# Altium PCB Inclinometer.PcbDoc
Units mm, origin at the board's own origin, x right, y up, seen from the top; angles counter-clockwise.
Board outline 73.8 x 82.4 mm, 2 copper layers (Top Layer, Bottom Layer), stack 0.98 mm thick; 52 components, 41 nets, 407 pads, 70 vias.
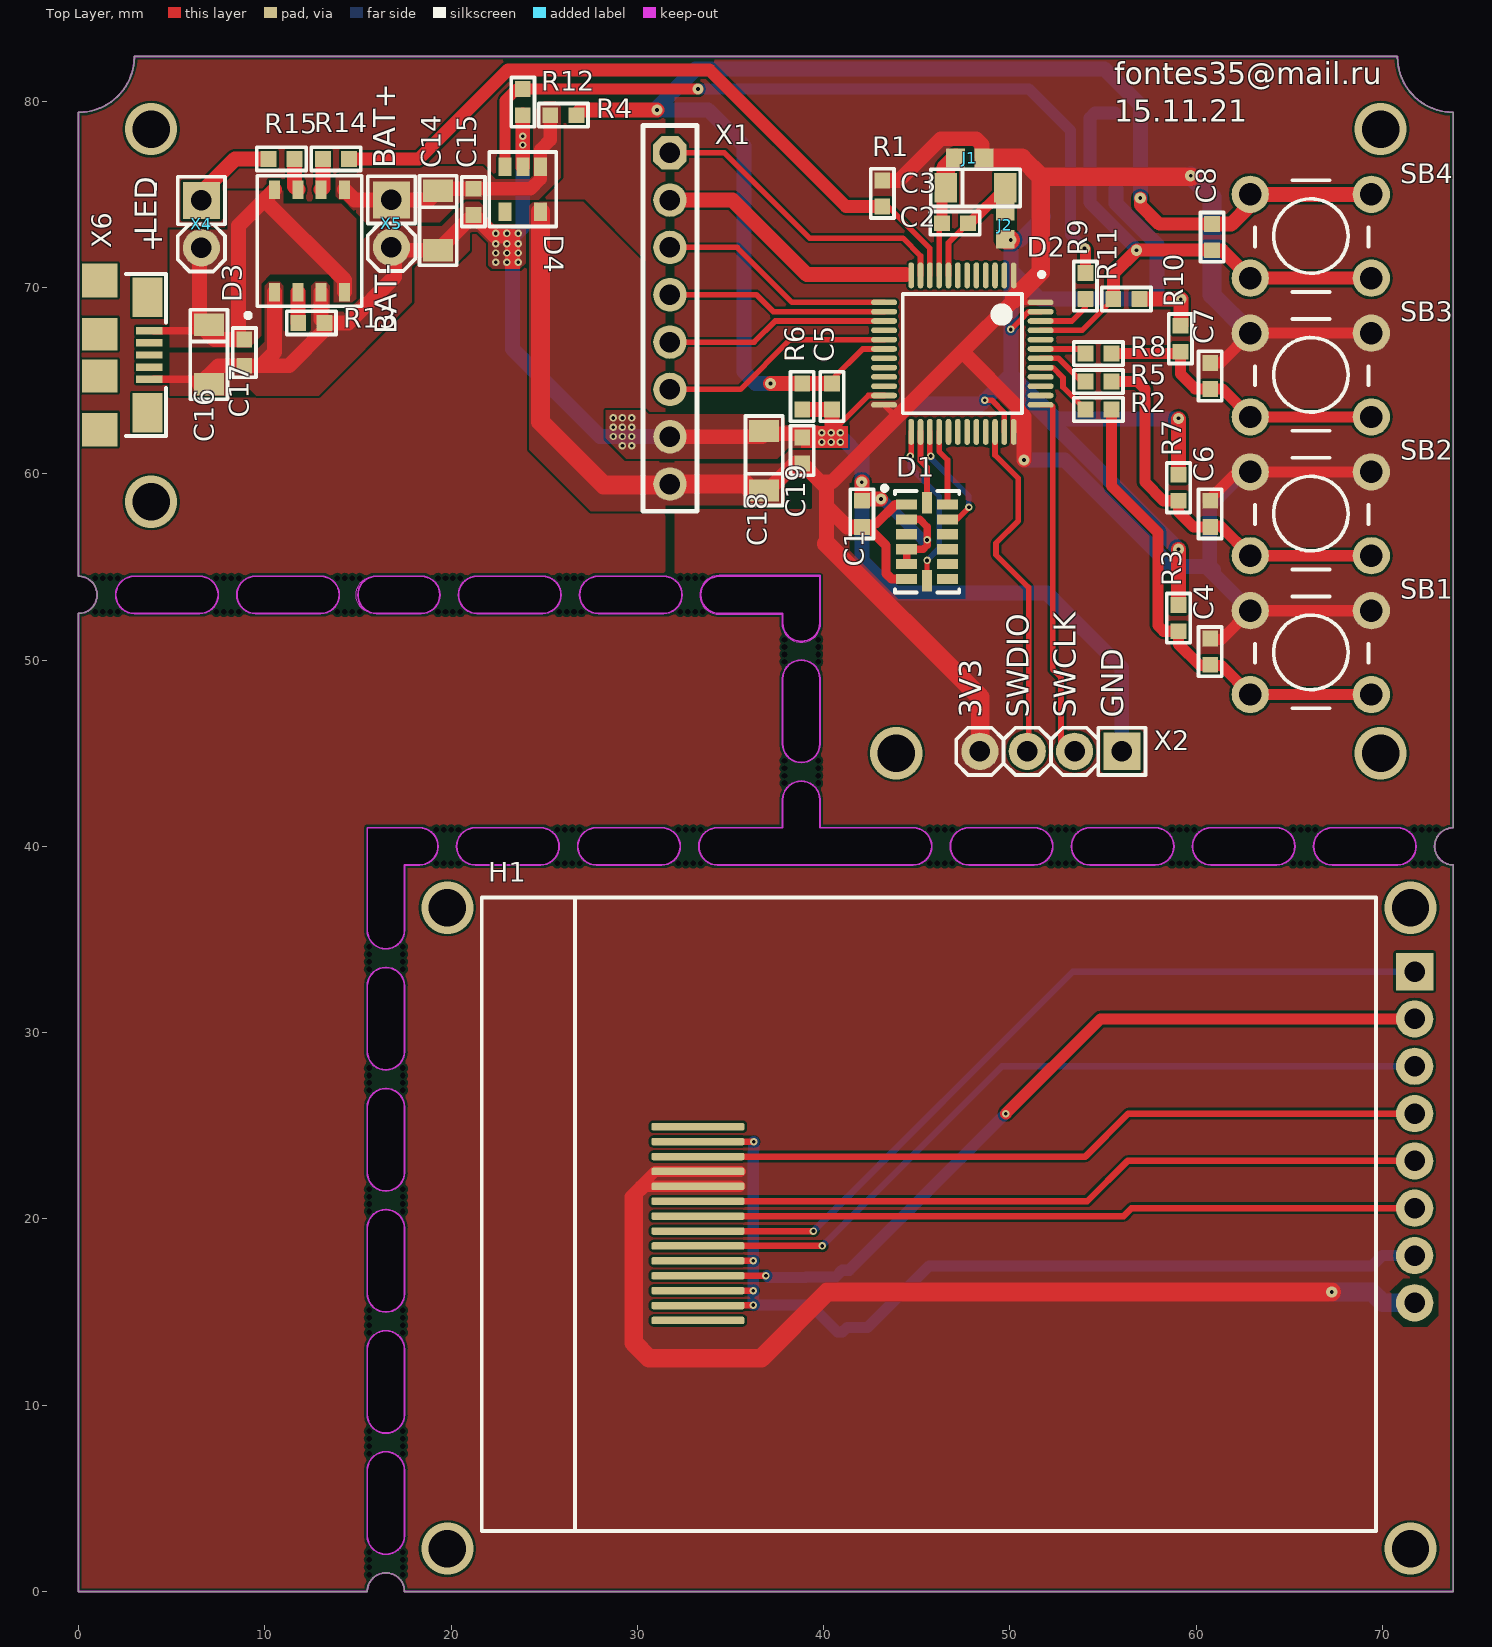
[diagram p0: Top Layer view]
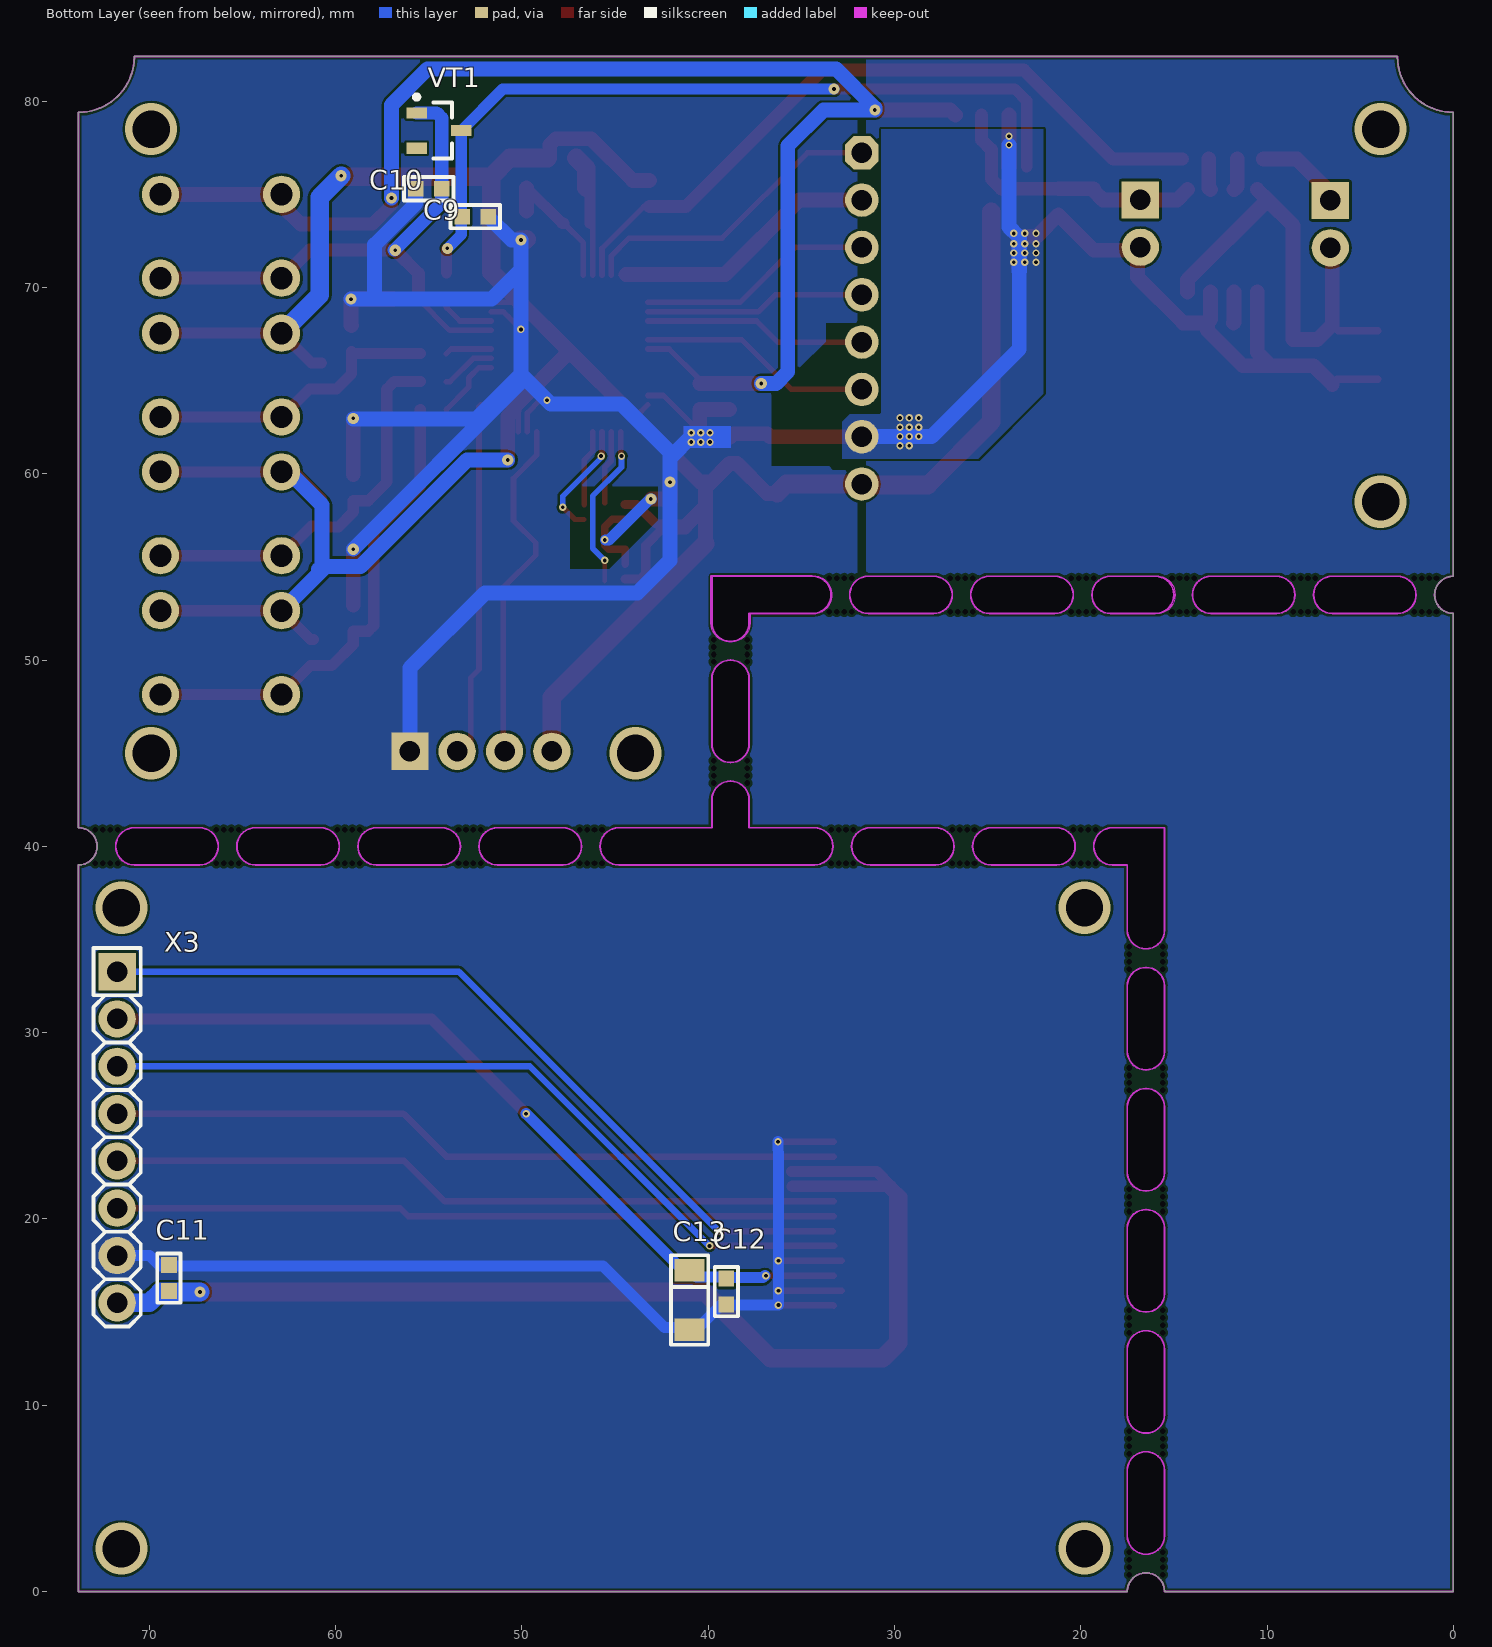
[diagram p1: Bottom Layer view, seen from below]
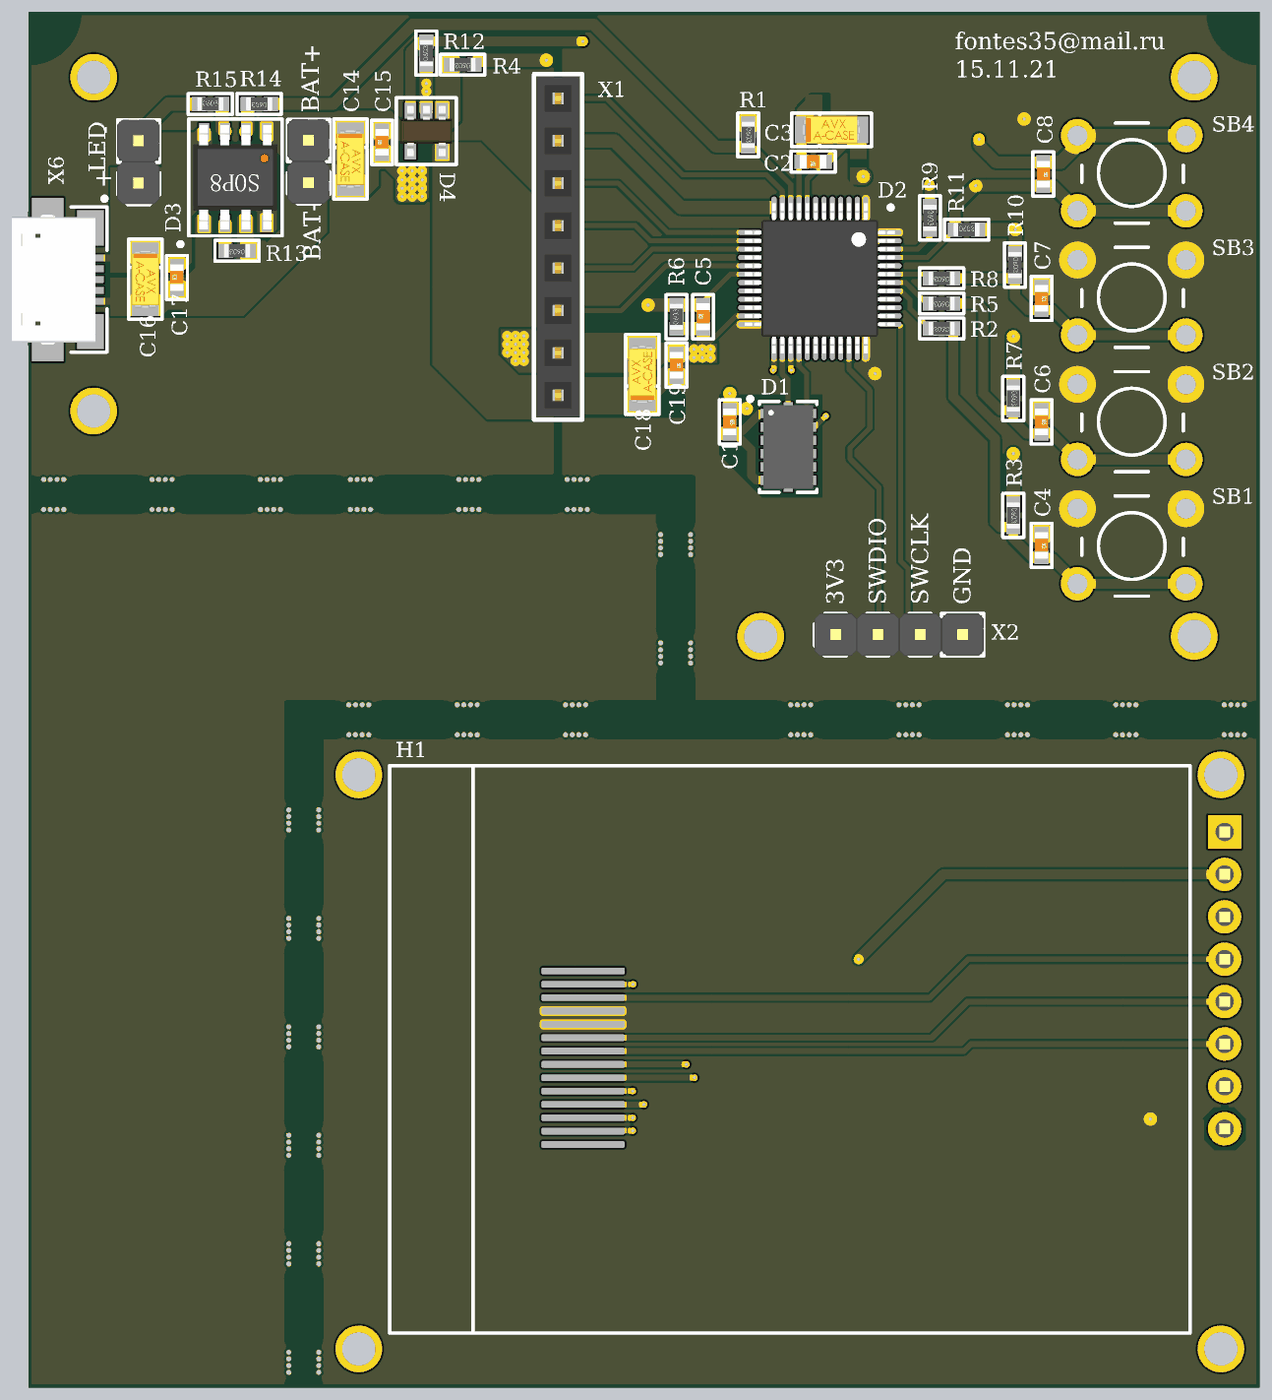
[diagram p2: 3D render of the assembled board from above, using the file's embedded part models]
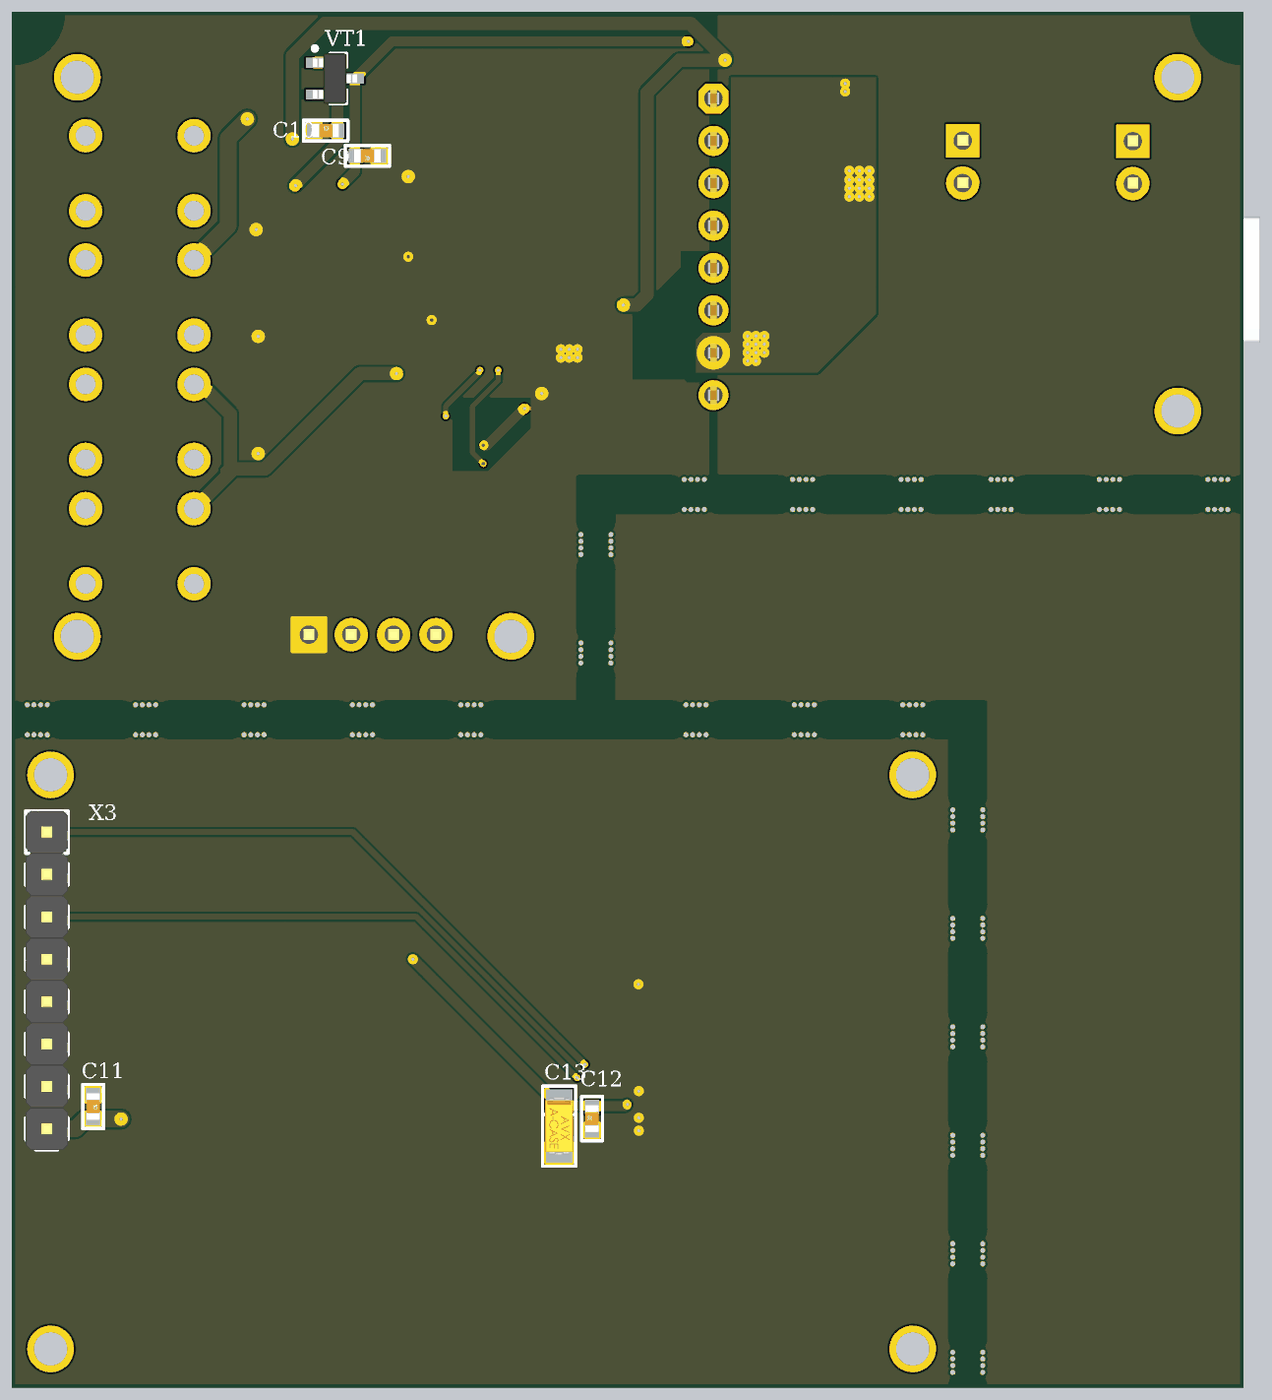
[diagram p3: 3D render of the assembled board from below, using the file's embedded part models]

## Layer stack, top to bottom
Top Solder: solder mask 0.0102, Solder Resist, Dk 3.5
Top Layer: signal copper 0.0356
Dielectric 1: dielectric 0.909, FR-4, Dk 4.8
Bottom Layer: signal copper 0.0356
Bottom Solder: solder mask 0.0102, Solder Resist, Dk 3.5

## Board outline
15.5,0 cw(c16.5,0) 17.5,0 73.8,0 73.8,39 cw(c73.8,40) 73.8,41 73.8,79.4 cw(c73.8,82.4) 70.8,82.4 3,82.4 cw(c0,82.4) 0,79.4 0,54.5 cw(c0,53.5) 0,52.5 0,0
cut-out: 34.399,52.45 ccw(c34.4,52.5) 34.4,52.45 37.75,52.45 37.75,52 cw(c37.8,52) 37.75,52.001 37.75,52 ccw(c38.8,52) 39.85,52 ccw(c39.8,52) 39.85,52.001 39.85,54.5 ccw(c39.8,54.5) 39.8,54.55 34.4,54.55 ccw(c34.4,53.5)
cut-out: 39.8,45.5 cw(c38.8,45.5) 37.8,45.5 37.8,49 cw(c38.8,49) 39.8,49
cut-out: 13,54.5 cw(c13,53.5) 13,52.5 9.5,52.5 cw(c9.5,53.5) 9.5,54.5
cut-out: 6.5,54.5 cw(c6.5,53.5) 6.5,52.5 3,52.5 cw(c3,53.5) 3,54.5
cut-out: 15.5,29 15.5,32.5 cw(c16.5,32.5) 17.5,32.5 17.5,29 cw(c16.5,29)
cut-out: 15.5,35.5 15.5,41 18.3,41 cw(c18.3,40) 18.3,39 17.5,39 17.5,35.5 cw(c16.5,35.5)
cut-out: 34.3,39 cw(c34.3,40) 34.3,41 37.8,41 37.8,42.5 cw(c38.8,42.5) 39.8,42.5 39.8,41 44.8,41 cw(c44.8,40) 44.8,39 41.3,39
cut-out: 17.5,9.5 cw(c16.5,9.5) 15.5,9.5 15.5,13 cw(c16.5,13) 17.5,13
cut-out: 17.5,16 cw(c16.5,16) 15.5,16 15.5,19.5 cw(c16.5,19.5) 17.5,19.5
cut-out: 17.5,22.5 cw(c16.5,22.5) 15.5,22.5 15.5,26 cw(c16.5,26) 17.5,26
cut-out: 17.5,3 cw(c16.5,3) 15.5,3 15.5,6.5 cw(c16.5,6.5) 17.5,6.5
cut-out: 27.8,39 cw(c27.8,40) 27.8,41 31.3,41 cw(c31.3,40) 31.3,39
cut-out: 21.3,39 cw(c21.3,40) 21.3,41 24.8,41 cw(c24.8,40) 24.8,39
cut-out: 47.8,39 cw(c47.8,40) 47.8,41 51.3,41 cw(c51.3,40) 51.3,39
cut-out: 54.3,39 cw(c54.3,40) 54.3,41 57.8,41 cw(c57.8,40) 57.8,39
cut-out: 67.3,39 cw(c67.3,40) 67.3,41 70.8,41 cw(c70.8,40) 70.8,39
cut-out: 60.8,39 cw(c60.8,40) 60.8,41 64.3,41 cw(c64.3,40) 64.3,39
cut-out: 31.4,54.5 cw(c31.4,53.5) 31.4,52.5 27.9,52.5 cw(c27.9,53.5) 27.9,54.5
cut-out: 21.4,52.5 cw(c21.4,53.5) 21.4,54.5 24.9,54.5 cw(c24.9,53.5) 24.9,52.5
cut-out: 15.9,52.5 cw(c15.9,53.5) 15.9,54.5 18.4,54.5 cw(c18.4,53.5) 18.4,52.5

## Design rules (kind name [scope] priority, off if disabled: settings)
Clearance [All] p1: gap=0.128 ignorepadtopadclearanceinfootprint=FALSE except(0: Arc-Hole Track-Hole SMDPad-Hole THPad-Hole Via-Hole Fill-Hole Poly-Hole Region-Hole Text-Hole)
PlaneConnect [All] p1: planeconnectstyle=Direct reliefexpansion=0.508 reliefentries=4 reliefconductorwidth=0.254 reliefairgap=0
PolygonConnect [All] p1: connectstyle=Direct reliefconductorwidth=0.254 reliefentries=4 polygonreliefangle="90 Angle" airgapwidth=0.254
RoutingVias [All] p1: holewidth=0.711 width=1.27 viastyle="Through Hole" minholewidth=0.2 minwidth=0.2 maxholewidth=10 maxwidth=10
SolderMaskExpansion [All] p1: expansion=0.102
Width [All] p1: maxlimit=10 minlimit=0.254 preferedwidth=0.254
29 further rules are at their usual default settings.

## Classes and differential pairs
component class InclinometerMain: C1 C2 C3 C4 C5 C6 C7 C8 C9 C10 C? D1 D2 D? H? J1 J2 J? R1 R2 R3 R4 R5 R6 R7 R8 R9 R10 R11 R12 R? SB1 SB2 SB3 SB4 SB? VT1 VT? X1 X2
component class InclinometerPower: C14 C15 C16 C17 C18 C19 D3 D4 R13 R14 R15 X4 X5 X6
component class InclinometerDisplay: C11 C12 C13 H1 X3

## Components (designator, comment, footprint, x,y, rotation, side; value= is the part's Value field where it differs from the comment)
C1 "Ceramic capacitor, 0.1μF, X7R, ±10%, 16V, 0603, -55...+125°C" "CAP: 0603" 42.05,57.85 r270 top value=0.1?F
C2 "Ceramic capacitor, 0.01μF, X7R, ±10%, 50V, 0603, -55...+125°C" "CAP: 0603" 47.05,73.45 r180 top value=0.01?F
C3 "Tantalum capacitor, 1μF, 35V, ±10%, 7.5Ohm, case A (3216), -55...+125°C" "CAP: TANTAL-A" 48.15,75.35 r0 top value=1?F
C4 "Ceramic capacitor, 0.1μF, X7R, ±10%, 16V, 0603, -55...+125°C" "CAP: 0603" 60.75,50.45 r270 top value=0.1?F
C5 "Ceramic capacitor, 0.1μF, X7R, ±10%, 16V, 0603, -55...+125°C" "CAP: 0603" 40.45,64.15 r90 top value=0.1?F
C6 "Ceramic capacitor, 0.1μF, X7R, ±10%, 16V, 0603, -55...+125°C" "CAP: 0603" 60.75,57.85 r270 top value=0.1?F
C7 "Ceramic capacitor, 0.1μF, X7R, ±10%, 16V, 0603, -55...+125°C" "CAP: 0603" 60.75,65.25 r270 top value=0.1?F
C8 "Ceramic capacitor, 0.1μF, X7R, ±10%, 16V, 0603, -55...+125°C" "CAP: 0603" 60.85,72.7 r270 top value=0.1?F
C9 "Ceramic capacitor, 0.1μF, X7R, ±10%, 16V, 0603, -55...+125°C" "CAP: 0603" 52.5,73.8 r0 bottom value=0.1?F
C10 "Ceramic capacitor, 0.1μF, X7R, ±10%, 16V, 0603, -55...+125°C" "CAP: 0603" 55,75.3 r180 bottom value=0.1?F
C11 "Ceramic capacitor, 0.1μF, X7R, ±10%, 16V, 0603, -55...+125°C" "CAP: 0603" 68.95,16.825 r270 bottom value=0.1?F
C12 "Ceramic capacitor, 0.1μF, X7R, ±10%, 16V, 0603, -55...+125°C" "CAP: 0603" 39.025,16.1 r90 bottom value=0.1?F
C13 "Tantalum capacitor, 1μF, 35V, ±10%, 7.5Ohm, case A (3216), -55...+125°C" "CAP: TANTAL-A" 41,15.65 r270 bottom value=1?F
C14 "Tantalum capacitor, 10μF, 16V, ±10%, 3Ohm, case A (3216), -55...+125°C" "CAP: TANTAL-A" 19.3,73.6 r270 top value=10?F
C15 "Ceramic capacitor, 0.1μF, X7R, ±10%, 16V, 0603, -55...+125°C" "CAP: 0603" 21.2,74.6 r90 top value=0.1?F
C16 "Tantalum capacitor, 10μF, 16V, ±10%, 3Ohm, case A (3216), -55...+125°C" "CAP: TANTAL-A" 7,66.4 r270 top value=10?F
C17 "Ceramic capacitor, 0.1μF, X7R, ±10%, 16V, 0603, -55...+125°C" "CAP: 0603" 8.9,66.5 r90 top value=0.1?F
C18 "Tantalum capacitor, 10μF, 16V, ±10%, 3Ohm, case A (3216), -55...+125°C" "CAP: TANTAL-A" 36.8,60.7 r90 top value=10?F
C19 "Ceramic capacitor, 0.1μF, X7R, ±10%, 16V, 0603, -55...+125°C" "CAP: 0603" 38.85,61.25 r270 top value=0.1?F
D1 "ADXL345" ADXL345 45.55,56.35 r0 top
D2 "STM32F103C8T6" LQFP48 47.45,66.45 r270 top
D3 "Linear Li-lon Battery Charger, VoltageInput, MaxDropout, VoltageOutput, 1A, -40...+85°C, SOP-8" SOP8 12.4,72.5 r90 top
D4 "Linear voltage regulator, input 0...12V, 0.25V, output 3.3V, 150mA, -40...+85°C, TSOP-5" 5-TSOP 23.85,75.275 r0 top
H1 "ST7735 (GMT177-01)" "ST7735 DISPLAY" 45.65,20.25 r180 top
J1 "2 way net tie junction" 2way_MP 47.85,76.95 r180 top net-tie
J2 "2 way net tie junction" 2way_MP 49.75,73.35 r270 top net-tie
R1 "Resistor film, 10k, ±1%, 0603, 0.1W, -55...+155°C" "RES: 0603" 43.15,75.05 r270 top value=10k
R2 "Resistor film, 1k, ±1%, 0603, 0.1W, -55...+155°C" "RES: 0603" 54.75,63.45 r180 top value=1k
R3 "Resistor film, 10k, ±1%, 0603, 0.1W, -55...+155°C" "RES: 0603" 59.05,52.25 r270 top value=10k
R4 "Resistor film, 33k, ±1%, 0603, 0.1W, -55...+155°C" "RES: 0603" 26.025,79.25 r180 top value=33k
R5 "Resistor film, 1k, ±1%, 0603, 0.1W, -55...+155°C" "RES: 0603" 54.75,64.95 r180 top value=1k
R6 "Resistor film, 76.8k, ±1%, 0603, 0.1W, -55...+155°C" "RES: 0603" 38.85,64.15 r90 top value=76.8k
R7 "Resistor film, 10k, ±1%, 0603, 0.1W, -55...+155°C" "RES: 0603" 59.05,59.25 r270 top value=10k
R8 "Resistor film, 1k, ±1%, 0603, 0.1W, -55...+155°C" "RES: 0603" 54.75,66.45 r180 top value=1k
R9 "Resistor film, 2k, ±1%, 0603, 0.1W, -55...+155°C" "RES: 0603" 54.05,70.075 r270 top value=1k
R10 "Resistor film, 10k, ±1%, 0603, 0.1W, -55...+155°C" "RES: 0603" 59.15,67.25 r270 top value=10k
R11 "Resistor film, 100k, ±5%, 0603, 0.1W, -55...+155°C" "RES: 0603" 56.25,69.375 r0 top value=100k
R12 "Resistor film, 1M, ±5%, 0603, 0.1W, -55...+155°C" "RES: 0603" 23.85,79.95 r90 top value=100k
R13 "Resistor film, 3k, ±1%, 0603, 0.1W, -55...+155°C" "RES: 0603" 12.5,68.1 r180 top value=3k
R14 "Resistor film, 2k, ±1%, 0603, 0.1W, -55...+155°C" "RES: 0603" 13.825,76.9 r180 top value=1k
R15 "Resistor film, 1k, ±1%, 0603, 0.1W, -55...+155°C" "RES: 0603" 10.9,76.9 r0 top value=1k
SB1 "Tactile button, 6x6mm" "BUT: 6x6" 66.15,50.4 r0 top
SB2 "Tactile button, 6x6mm" "BUT: 6x6" 66.15,57.85 r0 top
SB3 "Tactile button, 6x6mm" "BUT: 6x6" 66.15,65.3 r0 top
SB4 "Tactile button, 6x6mm" "BUT: 6x6" 66.15,72.75 r0 top
VT1 "MOSFET P-channel transistor, -20V, -2.8A, 7.7nC, 4.16W, 58mOhm, 744pF, SOT23, -55...+150°C" SOT23 54.45,78.425 r180 bottom
X1 "Connector, 8pin, 2.54mm, 500VAC, 3A" "CON: PBS-8" 31.75,68.34 r270 top
X2 "Connector, 4pin, 2.54mm, 500VAC, 3A" "CON: PLS-4" 52.2,45.1 r180 top
X3 "Connector, 8pin, 2.54mm, 500VAC, 3A" "CON: PLS-8" 71.725,24.385 r270 bottom
X4 "Connector, 2pin, 2.54mm, 500VAC, 3A" "CON: PLS-2" 6.6,73.4 r270 top
X5 "Connector, 2pin, 2.54mm, 500VAC, 3A" "CON: PLS-2" 16.8,73.43 r270 top
X6 "USB micro B" "CON: USB micro-A (ZX62-B-5PA)" 3.8,66.375 r270 top

## Footprints (in the part's own frame and the unit in brackets; to place one, negate y for a bottom-side part, rotate by r counter-clockwise, add the part's x,y. Pads: shape width x height; smd on the part's side, far side on the other; paste and mask are expansions set on the pad)
2way_MP [mil] "2 way medium power net tie junction"
  rrect5% 40x40 smd paste-100: 1(-30,0) 2(30,0)
5-TSOP [mm] "5-TSOP"
  rect 0.7x1 smd: 1(0.95,1.2) 2(0,1.2) 3(-0.95,1.2) 4(-0.95,-1.2) 5(0.95,-1.2)
  silkscreen extent -1.8,-2 1.8,2, body extent -1.55,-1.5 1.55,1.5, height 1.1
ADXL345 [mm]
  rect 1.145x0.55 smd: 1(-1.1,2) 2(-1.1,1.2) 3(-1.1,0.4) 4(-1.1,-0.4) 5(-1.1,-1.2) 6(-1.1,-2) 8(1.1,-2) 9(1.1,-1.2) 10(1.1,-0.4) 11(1.1,0.4) 12(1.1,1.2) 13(1.1,2)
  rect 0.55x1.145 smd: 7(0,-2.1) 14(0,2.1)
  silkscreen extent -2.4,-2.73 1.73,3, body extent -1.5,-2.5 1.5,2.5, height 1
"BUT: 6x6" [mm] "Leaded Tactile Button 6x6"
  round 2 hole 1.2: 1(-3.25,2.25) 1(3.25,2.25) 2(-3.25,-2.25) 2(3.25,-2.25)
  silkscreen extent -3,-2.99 3.1,3.01, body extent -3.15,-2.96 3.25,3.04, height 4.5
"CAP: 0603" [mm]
  rect 0.85x0.85 smd: 1(-0.7,0) 2(0.7,0)
  silkscreen extent -1.33,-0.63 1.33,0.63, body extent -0.8,-0.4 0.8,0.4, height 0.3
"CAP: TANTAL-A" [mm]
  rect 1.2x1.6 smd: 1(-1.6,0) 2(1.6,0)
  silkscreen extent -2.4,-1 2.4,1, body extent -1.7,-0.84 1.7,0.84, height 1.71
"CON: PBS-8" [mm] "PBS-8"
  oct 1.8x1.8 hole 1.1: 1(-8.89,0)
  round 1.8 hole 1.1: 2(-6.35,0) 3(-3.81,0) 4(-1.27,0) 5(1.27,0) 6(3.81,0) 7(6.35,0) 8(8.89,0)
  silkscreen extent -10.35,-1.45 10.35,1.45, body extent -10.16,-1.27 10.16,1.27, height 8.4
"CON: PLS-2" [mm]
  rect 2x2 hole 1.1: 1(-1.27,0)
  round 2 hole 1.1: 2(1.27,0)
  silkscreen extent -2.54,-1.27 2.54,1.27, body extent -2.57,-1.28 2.51,1.26, height 8.54
"CON: PLS-4" [mm] "PLS-40 4 pin header"
  rect 2x2 hole 1.1: 1(-3.81,0)
  round 2 hole 1.1: 2(-1.27,0) 3(1.27,0) 4(3.81,0)
  silkscreen extent -5.08,-1.27 5.08,1.27, body extent -5.08,-1.27 5.08,1.27, height 8.54
"CON: PLS-8" [mm] "PLS-40 8 pin header"
  rect 2x2 hole 1.1: 1(-8.89,0)
  round 2 hole 1.1: 2(-6.35,0) 3(-3.81,0) 4(-1.27,0) 5(1.27,0) 6(3.81,0) 7(6.35,0) 8(8.89,0)
  silkscreen extent -10.16,-1.27 10.16,1.27, body extent -10.16,-1.27 10.16,1.27, height 8.54
"CON: USB micro-A (ZX62-B-5PA)" [mm]
  rect 1.8x1.9 smd: 0(-4,-2.65) 0(4,-2.65)
  rect 2.1x1.6 smd: 0(-3.1,-0.1) 0(3.1,-0.1)
  rect 1.75x1.9 smd: 0(-1.125,-2.65) 0(1.125,-2.65)
  rect 0.4x1.4 smd: 1(-1.3,0) 2(-0.65,0) 3(0,0) 4(0.65,0) 5(1.3,0)
  round 0.5 on Top Overlay: ""(-4.85,0.75)
  silkscreen extent -4.35,-1.25 4.35,0.9, body extent -3.9,-4.8 3.9,0.2, height 2.68
LQFP48 [mm] "TSQFP, 48-Leads, Body 7,00x7,00mm, Pitch 0,50mm, IPC Medium Density"
  oval 1.4x0.3 smd: 1(-4.2,2.75) 2(-4.2,2.25) 3(-4.2,1.75) 4(-4.2,1.25) 5(-4.2,0.75) 6(-4.2,0.25) 7(-4.2,-0.25) 8(-4.2,-0.75) 9(-4.2,-1.25) 10(-4.2,-1.75) 11(-4.2,-2.25) 12(-4.2,-2.75) 25(4.2,-2.75) 26(4.2,-2.25) 27(4.2,-1.75) 28(4.2,-1.25) 29(4.2,-0.75) 30(4.2,-0.25) 31(4.2,0.25) 32(4.2,0.75) 33(4.2,1.25) 34(4.2,1.75) 35(4.2,2.25) 36(4.2,2.75)
  oval 0.3x1.4 smd: 13(-2.75,-4.2) 14(-2.25,-4.2) 15(-1.75,-4.2) 16(-1.25,-4.2) 17(-0.75,-4.2) 18(-0.25,-4.2) 19(0.25,-4.2) 20(0.75,-4.2) 21(1.25,-4.2) 22(1.75,-4.2) 23(2.25,-4.2) 24(2.75,-4.2) 37(2.75,4.2) 38(2.25,4.2) 39(1.75,4.2) 40(1.25,4.2) 41(0.75,4.2) 42(0.25,4.2) 43(-0.25,4.2) 44(-0.75,4.2) 45(-1.25,4.2) 46(-1.75,4.2) 47(-2.25,4.2) 48(-2.75,4.2)
  silkscreen extent -4.37,-3.2 3.2,4.38, body extent -4.5,-4.5 4.5,4.5, height 1.6
"RES: 0603" [mm]
  rect 0.85x0.85 smd: 1(-0.7,0) 2(0.7,0)
  silkscreen extent -1.33,-0.63 1.33,0.63, body extent -0.8,-0.4 0.8,0.4, height 0.44
SOP8 [mm]
  rect 1x0.6 smd: 1(-2.75,1.875) 2(-2.75,0.625) 3(-2.75,-0.625) 4(-2.75,-1.875) 5(2.75,-1.875) 6(2.75,-0.625) 7(2.75,0.625) 8(2.75,1.875)
  silkscreen extent -4.1,-2.8 3.5,3.4, body extent -3.13,-2.53 3.13,2.53, height 1.76
SOT23 [mm]
  rect 1.1x0.6 smd: 1(-1.2,0.95) 2(-1.2,-0.95) 3(1.2,0)
  round 0.5 on Mech2: ""(-0.9,1.1)
  silkscreen extent -1.33,-1.5 0.7,1.92, body extent -1.32,-1.52 1.32,1.52, height 1.12
"ST7735 DISPLAY" [mm]
  rrect50% 5x0.4 smd: 1(12.4,5.7) 1(12.4,5.7) 2(12.4,4.9) 2(12.4,4.9) 3(12.4,4.1) 3(12.4,4.1) 4(12.4,3.3) 4(12.4,3.3) 5(12.4,2.5) 5(12.4,2.5) 6(12.4,1.7) 6(12.4,1.7) 7(12.4,0.9) 7(12.4,0.9) 8(12.4,0.1) 8(12.4,0.1) 9(12.4,-0.7) 9(12.4,-0.7) 10(12.4,-1.5) 10(12.4,-1.5) 11(12.4,-2.3) 11(12.4,-2.3) 12(12.4,-3.1) 12(12.4,-3.1) 13(12.4,-3.9) 13(12.4,-3.9) 14(12.4,-4.7) 14(12.4,-4.7)
  silkscreen extent -24,-17 24,17

## Part data
C1 C4 C5 C6 C7 C8 C9 C10 C11 C12 C15 C17 C19: library part Ceramic_0603, Manufacturer="Murata Electronics", Package=0603, PartNumber=GRM188R71C104KA01D, Temperature=-55...+125°C, Tolerance=±10%, TypeCapacitor="Ceramic capacitor", TypeDielectric=X7R, ValueManufacturerPartNumber="Ceramic capacitor, 0.1?F, X7R, ±10%, 16V, 0603, -55...+125°C", Voltage=16V, HelpURL=https://www.digikey.com/product-detail/en/murata-electronics/GRM188R71C104KA01D/490-1532-2-ND/587060
C2: library part Ceramic_0603, Manufacturer="Murata Electronics", Package=0603, PartNumber=GRM188R71H103KA01D, Temperature=-55...+125°C, Tolerance=±10%, TypeCapacitor="Ceramic capacitor", TypeDielectric=X7R, ValueManufacturerPartNumber="Ceramic capacitor, 0.01?F, X7R, ±10%, 50V, 0603, -55...+125°C", Voltage=50V, HelpURL=https://www.digikey.com/product-detail/en/murata-electronics/GRM188R71H103KA01D/490-1512-2-ND/587151
C3 C13: library part Tantal_A, Manufacturer=AVX, Package="case A (3216)", PartNumber=TAJA105K035RNJ, Temperature=-55...+125°C, Tolerance=±10%, TypeCapacitor="Tantalum capacitor", ValueManufacturerPartNumber="Tantalum capacitor, 1?F, 35V, ±10%, 7.5Ohm, case A (3216), -55...+125°C", Voltage=35V, HelpURL=https://www.digikey.com/product-detail/en/avx-corporation/TAJA105K035RNJ/478-1651-2-ND/563759, Impedance=7.5Ohm
C14 C16 C18: library part Tantal_A, Manufacturer=AVX, Package="case A (3216)", PartNumber=TAJA106K016RNJ, Temperature=-55...+125°C, Tolerance=±10%, TypeCapacitor="Tantalum capacitor", ValueManufacturerPartNumber="Tantalum capacitor, 10?F, 16V, ±10%, 3Ohm, case A (3216), -55...+125°C", Voltage=16V, HelpURL=https://www.digikey.com/product-detail/en/avx-corporation/TAJA106K016RNJ/478-1655-1-ND/564687, Impedance=3Ohm
D1: "Axlerometer sensor", Case=ÑÑ-14-1, Manufacture="Analog Device", Help URL=https://www.analog.com/media/en/technical-documentation/data-sheets/ADXL345.pdf, Model=ADXL345
D2: "32bit microcontroller", Case="LQFP48 (7x7mm)", Manufacture=ST, Model=STM32F103C8T6
D3: library part TP4056, "Linear Li-lon Battery Charger", CurrentOutput=1A, Manufacturer="Top Power", Package=SOP-8, Temperature=-40...+85°C, ComponentType="Linear Li-lon Battery Charger", HelpURL=https://www.chipdip.ru/product/tp4056, PartNumber=TP4056, ValueManufacturerPartNumber="Linear Li-lon Battery Charger, VoltageInput, MaxDropout, VoltageOutput, 1A, -40...+85°C, SOP-8"
D4: library part NCP551SN33T1G, "Linear voltage regulator", CurrentOutput=150mA, Manufacturer="ON Semiconductor", Package=TSOP-5, Temperature=-40...+85°C, VoltageInput="input 0...12V", VoltageOutput="output 3.3V", ComponentType="Linear voltage regulator", HelpURL=https://www.digikey.com/en/products/detail/onsemi/NCP551SN33T1G/13511773, MaxDropout=0.25V, PartNumber=NCP551SN33T1G, ValueManufacturerPartNumber="Linear voltage regulator, input 0...12V, 0.25V, output 3.3V, 150mA, -40...+85°C, TSOP-5"
H1: library part "ST7735 DISPLAY", Manufacture=Sitronix, Help URL=https://pdf1.alldatasheetru.com/datasheet-pdf/view/326213/SITRONIX/ST7735.html, Model="ST7735 (GMT177-01)"
J1 J2: library part 2way, ComponentLink1Description=Source, ComponentLink1URL=http://www.edatools.cz/addons, FootprintNote="LP=12mil, MP=40mil, HP=120mil"
R1 R3 R7 R10: library part Resistor_0603, Manufacturer=Yageo, Package=0603, PartNumber=RC0603FR-0710KL, Power=0.1W, Temperature=-55...+155°C, Tolerance=±1%, TypeResistor="Resistor film", HelpURL=https://www.digikey.com/product-detail/en/yageo/RC0603FR-0710KL/311-10-0KHRCT-ND/729827, ValueManufacturerPartNumber="Resistor film, 10k, ±1%, 0603, 0.1W, -55...+155°C"
R2 R5 R8 R15: library part Resistor_0603, Manufacturer=Yageo, Package=0603, PartNumber=RC0603FR-071KL, Power=0.1W, Temperature=-55...+155°C, Tolerance=±1%, TypeResistor="Resistor film", HelpURL=https://www.digikey.com/product-detail/en/yageo/RC0603FR-071KL/311-1-00KHRCT-ND/729790, ValueManufacturerPartNumber="Resistor film, 1k, ±1%, 0603, 0.1W, -55...+155°C"
R4: library part Resistor_0603, Manufacturer=Yageo, Package=0603, PartNumber=RC0603JR-0733KL, Power=0.1W, Temperature=-55...+155°C, Tolerance=±1%, TypeResistor="Resistor film", HelpURL=https://www.digikey.com/product-detail/en/yageo/RC0603FR-0720KL/311-20-0KHRCT-ND/729987, ValueManufacturerPartNumber="Resistor film, 33k, ±1%, 0603, 0.1W, -55...+155°C"
R6: library part Resistor_0603, Manufacturer=Yageo, Package=0603, PartNumber=RC0603FR-0776K8L, Power=0.1W, Temperature=-55...+155°C, Tolerance=±1%, TypeResistor="Resistor film", HelpURL=https://www.digikey.com/product-detail/en/yageo/RC0603FR-0710KL/311-10-0KHRCT-ND/729827, ValueManufacturerPartNumber="Resistor film, 76.8k, ±1%, 0603, 0.1W, -55...+155°C"
R9 R14: library part Resistor_0603, Manufacturer=Yageo, Package=0603, PartNumber=RC0603FR-071KL, Power=0.1W, Temperature=-55...+155°C, Tolerance=±1%, TypeResistor="Resistor film", ValueManufacturerPartNumber="Resistor film, 1k, ±1%, 0603, 0.1W, -55...+155°C", HelpURL=https://www.digikey.com/product-detail/en/yageo/RC0603FR-071KL/311-1-00KHRCT-ND/729790
R11 R12: library part Resistor_0603, Manufacturer=Yageo, Package=0603, PartNumber=RC0603FR-07100KL, Power=0.1W, Temperature=-55...+155°C, Tolerance=±1%, TypeResistor="Resistor film", ValueManufacturerPartNumber="Resistor film, 100k, ±1%, 0603, 0.1W, -55...+155°C", HelpURL=https://www.digikey.com/product-detail/en/yageo/RC0603FR-0710KL/311-10-0KHRCT-ND/729827
R13: library part Resistor_0603, Manufacturer=Yageo, Package=0603, PartNumber=RC0603FR-073KL, Power=0.1W, Temperature=-55...+155°C, Tolerance=±1%, TypeResistor="Resistor film", HelpURL=https://www.digikey.com/product-detail/en/yageo/RC0603FR-071KL/311-1-00KHRCT-ND/729790, ValueManufacturerPartNumber="Resistor film, 3k, ±1%, 0603, 0.1W, -55...+155°C"
SB1 SB2 SB3 SB4: library part Button_tactile, Manufacturer="TE Connectivity", Package=6x6mm, PartNumber=FSM2JSMAATR, CommentText="\"Êíîïêà\"", HelpURL=https://www.digikey.com/product-detail/en/te-connectivity-alcoswitch-switches/FSM2JSMAATR/450-1792-1-ND/3503931, TypeButton="Tactile button", ValueManufacturerPartNumber="Tactile button, 6x6mm"
VT1: library part BAT54.215, "Schottky diode", Case=TO236/SOT23, Manufacture=Nexperia, Help URL=https://assets.nexperia.com/documents/data-sheet/BAT54_SER.pdf, Model=BAT54.215
X1: library part PBS-8, CurrentMax=3A, Manufacturer=Connfly, VoltageMax=500VAC, CommentText="\"Ðàçúåì\"", HelpURL=https://www.chipdip.ru/product/pbs-8, Multichannel=8pin, PartNumber=PBS-8, Pitch=2.54mm, TypeConnector=Connector, ValueManufacturerPartNumber="Connector, 8pin, 2.54mm, 500VAC, 3A"
X2: library part PLS-4, CurrentMax=3A, Manufacturer=Connfly, VoltageMax=500VAC, CommentText="\"Ðàçúåì\"", HelpURL=https://www.chipdip.ru/product/pls-4, Multichannel=4pin, PartNumber=PLS-4, Pitch=2.54mm, TypeConnector=Connector, ValueManufacturerPartNumber="Connector, 4pin, 2.54mm, 500VAC, 3A"
X3: library part PLS-8, CurrentMax=3A, Manufacturer=Connfly, VoltageMax=500VAC, CommentText="\"Ðàçúåì\"", HelpURL=https://www.chipdip.ru/product/pls-8-ds1021-1-8sf112, Multichannel=8pin, PartNumber=PLS-8, Pitch=2.54mm, TypeConnector=Connector, ValueManufacturerPartNumber="Connector, 8pin, 2.54mm, 500VAC, 3A"
X4 X5: library part PLS-2, CurrentMax=3A, Manufacturer=Connfly, VoltageMax=500VAC, CommentText="\"Ðàçúåì\"", HelpURL=https://www.chipdip.ru/product/pls-2, Multichannel=2pin, PartNumber=PLS-2, Pitch=2.54mm, TypeConnector=Connector, ValueManufacturerPartNumber="Connector, 2pin, 2.54mm, 500VAC, 3A"
X6: library part Connector_USB_micro_B, Manufacturer="Hirose Electric", PartNumber=ZX62-B-5PA, CommentText="\"USB\"", HelpURL=https://www.digikey.com/product-detail/en/hirose-electric-co-ltd/ZX62-B-5PA/H11579CT-ND/1851090, TypeConnector="USB micro B", ValueManufacturerPartNumber="USB micro B"

## Free pads (board coordinates)
  round 0 hole 0.3: ""(0.9,54.4) ""(0.9,52.6) ""(1.3,54.4) ""(1.3,52.6) ""(1.7,54.4) ""(1.7,52.6) ""(2.1,54.4) ""(2.1,52.6) ""(7.4,54.4) ""(7.4,52.6) ""(7.8,54.4) ""(7.8,52.6) ""(8.2,54.4) ""(8.2,52.6) ""(8.6,54.4) ""(8.6,52.6) ""(13.9,54.4) ""(13.9,52.6) ""(14.3,54.4) ""(14.3,52.6) ""(14.7,54.4) ""(14.7,52.6) ""(15.1,54.4) ""(15.1,52.6) ""(15.6,0.9) ""(15.6,1.3) ""(15.6,1.7) ""(15.6,2.1) ""(15.6,7.4) ""(15.6,7.8) ""(15.6,8.2) ""(15.6,8.6) ""(15.6,13.9) ""(15.6,14.3) ""(15.6,14.7) ""(15.6,15.1) ""(15.6,20.4) ""(15.6,20.8) ""(15.6,21.2) ""(15.6,21.6) ""(15.6,26.9) ""(15.6,27.3) ""(15.6,27.7) ""(15.6,28.1) ""(15.6,33.4) ""(15.6,33.8) ""(15.6,34.2) ""(15.6,34.6) ""(17.4,0.9) ""(17.4,1.3) ""(17.4,1.7) ""(17.4,2.1) ""(17.4,7.4) ""(17.4,7.8) ""(17.4,8.2) ""(17.4,8.6) ""(17.4,13.9) ""(17.4,14.3) ""(17.4,14.7) ""(17.4,15.1) ""(17.4,20.4) ""(17.4,20.8) ""(17.4,21.2) ""(17.4,21.6) ""(17.4,26.9) ""(17.4,27.3) ""(17.4,27.7) ""(17.4,28.1) ""(17.4,33.4) ""(17.4,33.8) ""(17.4,34.2) ""(17.4,34.6) ""(19.2,40.9) ""(19.2,39.1) ""(19.3,54.4) ""(19.3,52.6) ""(19.6,40.9) ""(19.6,39.1) ""(19.7,54.4) ""(19.7,52.6) ""(20,40.9) ""(20,39.1) ""(20.1,54.4) ""(20.1,52.6) ""(20.4,40.9) ""(20.4,39.1) ""(20.5,54.4) ""(20.5,52.6) ""(25.7,40.9) ""(25.7,39.1) ""(25.8,54.4) ""(25.8,52.6) ""(26.1,40.9) ""(26.1,39.1) ""(26.2,54.4) ""(26.2,52.6) ""(26.5,40.9) ""(26.5,39.1) ""(26.6,54.4) ""(26.6,52.6) ""(26.9,40.9) ""(26.9,39.1) ""(27,54.4) ""(27,52.6) ""(32.2,40.9) ""(32.2,39.1) ""(32.3,54.4) ""(32.3,52.6) ""(32.6,40.9) ""(32.6,39.1) ""(32.7,54.4) ""(32.7,52.6) ""(33,40.9) ""(33,39.1) ""(33.1,54.4) ""(33.1,52.6) ""(33.4,40.9) ""(33.4,39.1) ""(33.5,54.4) ""(33.5,52.6) ""(37.9,43.4) ""(37.9,43.8) ""(37.9,44.2) ""(37.9,44.6) ""(37.9,49.9) ""(37.9,50.3) ""(37.9,50.7) ""(37.9,51.1) ""(39.7,43.4) ""(39.7,43.8) ""(39.7,44.2) ""(39.7,44.6) ""(39.7,49.9) ""(39.7,50.3) ""(39.7,50.7) ""(39.7,51.1) ""(45.7,40.9) ""(45.7,39.1) ""(46.1,40.9) ""(46.1,39.1) ""(46.5,40.9) ""(46.5,39.1) ""(46.9,40.9) ""(46.9,39.1) ""(52.2,40.9) ""(52.2,39.1) ""(52.6,40.9) ""(52.6,39.1) ""(53,40.9) ""(53,39.1) ""(53.4,40.9) ""(53.4,39.1) ""(58.7,40.9) ""(58.7,39.1) ""(59.1,40.9) ""(59.1,39.1) ""(59.5,40.9) ""(59.5,39.1) ""(59.9,40.9) ""(59.9,39.1) ""(65.2,40.9) ""(65.2,39.1) ""(65.6,40.9) ""(65.6,39.1) ""(66,40.9) ""(66,39.1) ""(66.4,40.9) ""(66.4,39.1) ""(71.7,40.9) ""(71.7,39.1) ""(72.1,40.9) ""(72.1,39.1) ""(72.5,40.9) ""(72.5,39.1) ""(72.9,39.1) ""(72.9,40.9)

## Via types
v1: diameter 0.4, hole 0.2, Top Layer to Bottom Layer, 46 vias
v2: diameter 0.6, hole 0.2, Top Layer to Bottom Layer, 15 vias
v3: diameter 2.8, hole 2, Top Layer to Bottom Layer, 9 vias

## Nets (pads, with @x,y where several pads share a name; then routed paths per layer and width w, separated by ;. In a path a pad name is that pad's centre, name@x,y a point inside that pad or via, vN(x,y) a via of type N, cw(c..) or ccw(c..) an arc to the next point about the centre after c; other vN are vias at no path point)
3V3: C1.2 C4.1 C6.1 C7.1 C18.1 C19.2 D1.1 D1.6 D2.1 D2.24 D2.36 D2.48 D4.5 J1.1 R1.1 SB1.1 SB2.1 SB3.1 X1.8 X2.4 | length 168.2
  Top Layer w0.3: D2.24 43.806,63.144 44.022,63.144 ; D2.36 50.2,63.378 ; D2.1 50.2,69.378 50.228,69.35 ; 50.378,69.2 D2.48
  Top Layer w0.5: D1.6 43.65,54.35 43.35,54.65 43.35,56.15 42.35,57.15 C1.2 42.2,57.3 42.8,57.3 43.828,58.328 43.85,58.35 D1.1
  Top Layer w0.6: C6.1 60.75,58.65 62.2,60.1 62.9,60.1 SB2.1@69.4,60.1 ; C7.1 61.3,65.95 62.9,67.55 SB3.1@69.4,67.55 ; 61.2,51.1 61.35,51.1 62.9,52.65 SB1.1@69.4,52.65
  Top Layer w0.8: X1.8@31.4,59.4 X1.8@31.8,59 ; C18.1@36.3,58.95 36.85,58.95 38.45,60.55 C19.2 39.85,59.55 ; 40.15,56.25 40.15,58.25 ; C1.2 41.25,57.15 40.15,58.25 ; R1.1 44.05,75.75 46.286,77.986 48.181,77.986 48.505,77.662 48.505,77.057 J1.1 ; 50.228,69.35 47.439,66.561 ; v2(50.756,60.744) 50.756,63.085 50.422,63.419 50.422,63.578 47.439,66.561 ; 39.85,59.55 40.428,59.55 44.022,63.144 47.439,66.561 ; 39.85,59.55 40.15,59.25 40.15,58.25
  Top Layer w1: D4.5 24.8,62.8 28.2,59.4 X1.8@31.4,59.4 ; X1.8 35.8,59.45 C18.1@36.3,58.95 ; 40.15,56.25 48.4,48 48.4,45.84 48.39,45.83 X2.4 ; J1.1 50.65,76.95 51.65,75.95 ; 50.2,69.378 51.65,70.828 51.65,75.95 ; v2@59.7,75.95 51.65,75.95
  Bottom Layer w0.8: v2(50.756,60.744) 52.943,60.744 58.666,55.022 60.725,55.022 60.725,58.325 62.5,60.1 SB2.1@62.9,60.1 ; 60.928,54.872 60.678,54.872 62.5,53.05 SB1.1@62.9,53.05
  Bottom Layer w1: v2(59.7,76) 60.85,74.85 60.85,69.6 SB3.1@62.9,67.55
"3V3 LCD": C11.2 H1.10 H1.11 X3.8 | length 64.6
  Top Layer w0.6: H1.10@35.5,21.75 33.25,21.75 30.425,21.75 ; H1.11@35.525,22.55 30.95,22.55 30.15,21.75 ; 30.15,21.75 30.425,21.75 ; 30.15,21.75 29.6,21.2 29.875,21.2 30.425,21.75
  Top Layer w1: 29.8,21.125 29.8,13.35 30.625,12.525 36.65,12.525 40.2,16.075 v2(67.275,16.075)
  Bottom Layer w1: v2(67.275,16.075) 69.425,16.075 70.005,15.495 X3.8
5Vin: C16.1 C17.2 D3.4 D3.8 X4.2 X6.1 | length 24.7
  Top Layer w0.4: X6.1@4.05,67.675 6.175,67.675 C16.1@6.5,68
  Top Layer w0.8: X4.2@6.5,72.13 6.5,68 7.3,67.2 8.6,67.2 8.6,73.325 9.975,74.7 ; D3.8 9.975,74.7 ; D3.4 14.275,70.4 9.975,74.7
AGND: C2.1 C3.2 D2.8 J2.1 | length 7.3
  Top Layer w0.3: D2.8 46.7,72.4 C2.1
  Top Layer w0.6: C2.1 47.85,73.45 C3.2
  Top Layer w0.8: J2.1 C3.2
BRIGHTNESS: D2.12 X1.2 | length 14.6
  Top Layer w0.254: 44.4,70.7 44.45,70.65 D2.12
  Top Layer w0.8: X1.2 35.11,74.69 39.1,70.7 44.4,70.7
Charge: D2.10 R1.2 R14.1 | length 38.6
  Top Layer w0.3: R1.2 43.45,74.35 45.7,72.1 D2.10
  Top Layer w0.7: R14.1 18.275,76.9 23.05,81.675 33.875,81.675 41.2,74.35 R1.2
ComandLine: D2.11 X1.1 | length 16.8
  Top Layer w0.3: X1.1 34.67,77.23 39.25,72.65 44.25,72.65 45.2,71.7 D2.11
Enable: C9.2 D4.3 R9.1 R12.2 VT1.3 | length 43.1
  Top Layer w0.6: D4.3 22.9,80.025 23.525,80.65 R12.2 v2(33.25,80.65) ; v2(54,72.1) 54.05,72.05 R9.1
  Bottom Layer w0.6: v2(33.25,80.65) 51.025,80.65 VT1.3 53.25,72.85 v2(54,72.1)
GND: C1.1 C5.1 C9.1 C10.1 C14.2 C15.1 C16.2 C17.1 C18.2 C19.1 D1.2 D1.4 D1.5 D2.23 D2.35 D2.47 D3.1 D3.3 D4.2 J2.2 R3.1 R6.1 R7.1 R10.1 R11.2 R12.1 R13.1 X1.7 X2.1 X5.2 X6.5 | length 180.7
  Top Layer w0.3: v1@40.85,62.05 40.85,62.65 42.4,64.2 D2.23 ; v1(48.65,63.95) 49.023,63.95 49.7,63.273 D2.35 ; v1(50.05,67.75) 50.672,68.372 50.672,68.377 50.923,68.628 50.928,68.628 51,68.7 D2.47
  Top Layer w0.4: X6.5@4.05,65.075 6.225,65.075 C16.2@6.5,64.8 ; D1.5 D1.4 45.35,55.95 45.55,56.15 v1(45.55,56.45) 45.55,57.15 45.15,57.55 D1.2
  Top Layer w0.8: C16.2@6.5,64.8 7.5,65.8 C17.1 9.8,65.8 ; D3.1 10.525,66.525 9.8,65.8 ; D3.3 13.025,68.275 R13.1 ; 23.3,72.75 22.4,72.75 22.35,72.75 C15.1 C14.2 16.96,72 16.96,70.56 14.5,68.1 R13.1 ; D4.2 v1(23.85,77.65) v1(23.85,78.125) R12.1 ; X1.7 36.69,61.99 36.85,62.15 38.65,62.15 C19.1 ; R6.1 C5.1 40.45,62.25 v1(40.4,62.2) ; v2(42.05,59.55) C1.1 42.15,58.65 v2@43.05,58.65 ; R11.2 v2(59.175,69.375) 59.175,67.975 R10.1 ; R3.1 v2(59.05,55.95) ; R7.1 v2@59.05,62.95 ; 9.8,65.8 11.3,65.8 13.2,67.7 R13.1
  Top Layer w1: J2.2 49.788,72.55 v2(50.05,72.55)
  Bottom Layer w0.6: v2@43.05,58.65 v2(43.075,58.65) 43.124,58.65 45.324,56.45 v1@45.495,56.45
  Bottom Layer w0.8: v1(23.85,77.65) 23.85,73.25 23.35,72.75 23.3,72.75 23.3,71.85 23.3,66.7 28,62 v1(28.7,62) v1(29.2,62) v1(29.7,62) X1.7@31.34,62 ; X1.7 31.74,62 X1.7@31.34,62 ; X1.7@31.8,61.54 X1.7@31.34,62 ; v1@40.85,62.05 42.05,60.85 ; C9.1 50.55,72.55 v2(50.05,72.55) 50.05,70.95 ; C10.1 55.7,74.5 57.9,72.3 57.9,69.375 ; X2.1 56.01,45.83 56,45.82 56,49.58 51.98,53.6 43.8,53.6 42.05,55.35 v2(42.05,59.55) 42.05,60.85 ; v2(59.05,55.95) 50.05,64.95 50.05,65.35 ; v2@59.05,62.95 52.45,62.95 50.05,65.35 ; v2(59.175,69.375) 57.9,69.375 ; 42.05,60.85 42.05,61.15 44.65,63.75 48.45,63.75 v1(48.65,63.95) 50.05,65.35 ; 50.05,65.35 v1(50.05,67.75) 50.05,70.95 ; 50.05,70.95 51.625,69.375 57.9,69.375
  other v1: 29.2,61.5 29.7,61.5 39.9,61.7 40.4,61.7 40.9,61.7 39.9,62.2 40.9,62.2 28.7,62.5 29.2,62.5 29.7,62.5 28.7,63 29.2,63 29.7,63 22.4,71.35 23,71.35 23.6,71.35 22.4,71.85 23,71.85 23.6,71.85 22.4,72.35 23,72.35 23.6,72.35 22.4,72.9 23,72.9 23.6,72.9
  other v2: 59.05,62.975
"GND LCD": C11.1 C12.1 C13.2 H1.2 H1.3 H1.5 H1.13 X3.7 | length 59.3
  Top Layer w0.35: H1.3@32.825,16.15 v1(36.225,16.15) ; H1.5@32.825,17.75 v1(36.225,17.75) ; H1.2@33.25,15.35 33.275,15.375 v1(36.225,15.375) ; H1.13@33.271,24.141 33.275,24.15 v1(36.25,24.15)
  Bottom Layer w0.6: v1(36.25,24.15) 36.225,23.125 v1(36.225,17.75) 36.225,16.725 v1(36.225,16.15) v1(36.225,15.375) 39.3,15.375 40.75,13.925 41,13.925 41.25,14.175 42.35,14.175 45.65,17.475 69.425,17.475 69.985,18.035 X3.7
"LCD Brightness": C12.2 C13.1 H1.4 X3.2 | length 44.2
  Top Layer w0.35: H1.4@33.25,16.95 v1(36.9,16.95)
  Top Layer w0.6: v1@49.8,25.65 v1(49.775,25.65) 54.86,30.735 X3.2
  Bottom Layer w0.6: v1@36.953,16.95 37.053,16.85 39.025,16.85 39.05,16.875 40.625,16.875 C13.1 41.375,17.25 v1(49.775,25.65)
NetC4_2: C4.2 R2.1 R3.2 SB1.2 | length 26
  Top Layer w0.6: R2.1 55.45,59.35 57.95,56.85 57.95,51.85 58.25,51.55 R3.2 59.05,50.85 60.2,49.7 61.35,49.7 62.9,48.15 SB1.2@69.4,48.15
NetC5_2: C5.2 C8.1 D2.18 R4.1 R6.2 SB4.1 | length 77.6
  Top Layer w0.254: C5.2 C5.2@40.45,65.05
  Top Layer w0.3: C5.2@40.45,65.05 42.1,66.7 D2.18
  Top Layer w0.7: v2(57,74.8) 57,74.425 58.025,73.4 C8.1
  Top Layer w0.8: R4.1 27,79.525 v2(31.05,79.525) ; v2(37.15,64.85) R6.2 C5.2 ; C8.1 61.875,73.4 62.9,74.425 62.9,75 SB4.1@69.4,75
  Bottom Layer w0.8: v2(37.15,64.85) 36.35,64.85 35.725,65.475 35.725,77.6 33.8,79.525 v2(31.05,79.525) 31.05,79.65 33.125,81.725 55.075,81.725 57,79.8 v2(57,74.8)
NetC6_2: C6.2 R5.1 R7.2 SB2.2 | length 21.1
  Top Layer w0.6: R5.1 56.85,64.95 57.25,64.55 57.25,59.55 58.25,58.55 R7.2 59.05,57.95 59.85,57.15 60.65,57.15 60.7,57.2 61.3,57.2 62.9,55.6 SB2.2@69.4,55.6
NetC7_2: C7.2 R8.1 R10.2 SB3.2 | length 16.1
  Top Layer w0.6: R8.1 59.05,66.45 R10.2 59.15,65.35 59.95,64.55 C7.2 61.4,64.55 62.9,63.05 SB3.2@69.4,63.05
NetC8_2: C8.2 C10.2 D2.45 R11.1 SB4.2 VT1.1 | length 30.6
  Top Layer w0.3: D2.45 53.875,67.7 R11.1
  Top Layer w0.7: R11.1 55.55,70.75 v2(56.8,72) C8.2 61.4,72 62.9,70.5 SB4.2@69.4,70.5
  Bottom Layer w0.7: VT1.1 54.575,79.375 54.3,79.1 54.3,74.55 v2@56.85,72
NetD2_41: D2.41 R2.2 | length 3.6
  Top Layer w0.3: D2.41 52.305,65.7 52.85,65.155 52.85,64.65 R2.2
NetD2_42: D2.42 R5.2 | length 2.9
  Top Layer w0.3: D2.42 52.6,66.2 53.85,64.95 R5.2
NetD2_43: D2.43 R8.2 | length 2.5
  Top Layer w0.3: D2.43 53.8,66.7 R8.2
NetD2_46: D2.46 R9.2 | length 3.2
  Top Layer w0.3: D2.46 53.325,68.2 54.05,68.925 R9.2
NetD3_2: D3.2 R13.2 | length 1.7
  Top Layer w0.8: D3.2 11.775,68.125 R13.2
NetD3_6: D3.6 R14.2 | length 1.7
  Top Layer w0.8: D3.6 13.125,75.35 R14.2
NetD3_7: D3.7 R15.2 | length 1.7
  Top Layer w0.8: R15.2 11.6,75.425 D3.7
NetH1_6: H1.6 X3.3 | length 42.5
  Top Layer w0.35: H1.6@33.225,18.55 33.25,18.55 v1(39.925,18.55)
  Bottom Layer w0.35: v1(39.925,18.55) 49.57,28.195 X3.3
NetH1_7: H1.7 X3.1 | length 44.2
  Top Layer w0.35: H1.7@33.3,19.35 v1(39.45,19.35)
  Bottom Layer w0.35: v1(39.45,19.35) 53.375,33.275 X3.1
NetH1_8: H1.8 X3.6 | length 38.7
  Top Layer w0.35: H1.8@33.25,20.15 56.1,20.15 56.525,20.575 X3.6
NetH1_9: H1.9 X3.5 | length 39.4
  Top Layer w0.35: H1.9@33.25,20.95 54.15,20.95 56.315,23.115 X3.5
NetH1_12: H1.12 X3.4 | length 39.4
  Top Layer w0.35: H1.12@33.25,23.35 54.05,23.35 56.355,25.655 X3.4
NetR15_1: R15.1 X4.1 | length 4.8
  Top Layer w0.8: X4.1@6.5,74.67 6.5,75 8.4,76.9 R15.1
Reset: D2.13 X1.3 | length 12.7
  Top Layer w0.3: X1.3 35.35,72.15 38.3,69.2 D2.13
SPI1_CS: D2.14 X1.4 | length 11.9
  Top Layer w0.3: X1.4 36.39,69.61 37.3,68.7 D2.14
SPI1_MOSI: D2.17 X1.6 | length 12.6
  Top Layer w0.3: X1.6 35.53,64.53 38.2,67.2 D2.17
SPI1_SCK: D2.15 X1.5 | length 12
  Top Layer w0.3: X1.5 36.27,67.07 37.4,68.2 D2.15
SPI2_CS: D1.7 D2.25 | length 8.9
  Top Layer w0.254: v1(44.65,60.95) v1@44.7,61 ; D1.7 v1(45.55,55.35)
  Top Layer w0.3: v1@44.7,61 D2.25
  Bottom Layer w0.3: v1(44.65,60.95) 44.65,60.35 46.2,58.8 46.2,56 v1(45.55,55.35)
SPI2_MISO: D1.12 D2.27 | length 6.3
  Top Layer w0.254: v1@45.7,61 v1(45.75,60.95) ; D1.12 D1.12@47.15,57.55
  Top Layer w0.3: v1@45.7,61 D2.27 ; D1.12@47.15,57.55 v1(47.8,58.2)
  Bottom Layer w0.254: v1@45.75,60.85 v1(45.75,60.95)
  Bottom Layer w0.3: v1@45.75,60.85 47.8,58.8 v1(47.8,58.2)
SPI2_MOSI: D1.13 D2.28 | length 4.1
  Top Layer w0.3: D2.28 46.2,61.2 46.65,60.75 D1.13
SPI2_SCK: D1.14 D2.26 | length 3.9
  Top Layer w0.3: D2.26 45.2,60.7 45.55,60.35 D1.14
SWCLK: D2.37 X2.2 | length 19.4
  Top Layer w0.3: D2.37 52.2,63.7 52.3,63.6 52.3,49.5 52.74,49.06 X2.2@52.74,45.1
SWDIO: D2.34 X2.3 | length 19.2
  Top Layer w0.3: D2.34 49.2,61 50.45,59.75 50.45,57.478 49.25,56.278 49.25,55.65 51,53.9 51,45.9 X2.3@50.2,45.1
Vbat: C14.1 C15.2 D3.5 D4.1 R4.2 X5.1 | length 14.8
  Top Layer w0.7: C15.2 24.275,75.3 24.8,75.825 D4.1 24.8,77.4 25.325,77.925 R4.2
  Top Layer w0.8: D3.5 14.825,74.7 X5.1 18.8,74.7 C14.1 ; C14.1@19.3,75.3 C15.2
VDDA: C2.2 C3.1 D2.9 J1.2 | length 6.7
  Top Layer w0.3: D2.9 46.2,73.3 C2.2
  Top Layer w0.6: C2.2 46.35,75.15 C3.1
  Top Layer w1: C3.1 46.55,76.412 J1.2
pads on no net: D1.3 D1.8 D1.9 D1.10 D1.11 D2.2 D2.3 D2.4 D2.5 D2.6 D2.7 D2.16 D2.19 D2.20 D2.21 D2.22 D2.29 D2.30 D2.31 D2.32 D2.33 D2.38 D2.39 D2.40 D2.44 D4.4 H1.1 H1.14 VT1. VT1.2 X6. X6.0 X6.2 X6.3 X6.4
copper on no net:
  other v3: 19.8,2.3 71.5,2.3 19.8,36.7 71.5,36.7 43.9,45 69.9,45 3.9,58.5 3.9,78.5 69.9,78.5

## Polygon pours and split planes (outlines as drawn)
GND on Top Layer "Bottom Layer-No Net" (solid, pour order 8): 31.3,60.8 29.4,60.8 28.3,61.9 28.3,63.4 30.4,63.4 30.6,63.2 31.3,63.2
GND on Top Layer "Bottom Layer-No Net" (solid, pour order 9): 30.6,63.2 30.6,61.5 31.3,60.8 37.504,60.8 38.104,61.4 38.5,61.4 39.6,61.4 39.7,61.5 39.7,62.6 39.5,62.8 38.1,62.8 37.7,63.2
3V3 on Top Layer "Bottom Layer-No Net" (solid, pour order 70): 32,82.4 73.8,82.4 73.8,41 39.8,41 39.8,54.5 32,54.5
"3V3 LCD" on Top Layer "Bottom Layer-No Net" (solid, pour order 66): 17.5,39 17.5,0 73.8,0 73.8,39
no net on Top Layer "Bottom Layer-No Net" (solid, pour order 60): 31.5,82.4 31.5,54.5 0,54.5 0,82.4
3V3 on Top Layer "Bottom Layer-No Net" (solid, pour order 54): 24.4,74.6 27.1,74.6 30.3,71.4 30.3,61.5 31.2,60.6 33.1,60.6 33.1,58 27.5,58 24.2,61.3 24.2,74.4
Vbat on Top Layer "Bottom Layer-No Net" (solid, pour order 52): 14.9,76.1 14,76.1 13.8,75.9 13.8,74.9 14,74.7 14.2,74.7 14.9,74
Vbat on Top Layer "Bottom Layer-No Net" (solid, pour order 50): 14.9,74 15.4,73.5 19.4,73.5 20.6,74.7 24.7,74.7 25.9,75.9 25.9,79.7 25.6,80 25,80 24.4,79.4 24.4,76 24.2,75.8 22.4,75.8 21.7,76.5 15.3,76.5 14.9,76.1
GND on Top Layer "Bottom Layer-No Net" (solid, pour order 46): 4.9,66.5 4.9,64.2 12.9,64.2 17.9,69.2 17.9,71.1 18.1,71.3 20.3,71.3 21,72 21,72.9 21.1,73 21.4,73 22,72.4 22,71.2 22.2,71 23.7,71 24,71.3 24,73.4 22.3,73.4 21.8,73.9 21.8,74.3 21.5,74.6 20.8,74.6 19.5,73.3 16,73.3 15.3,72.6 15.3,69.6 14.3,68.6 14.2,68.7 13.5,68.7 13.5,70.1 13.3,70.3 12.7,70.3 12.5,70.1 12.5,67.7 12.3,67.5 11.2,67.5 11,67.7 11,70.1 10.8,70.3 10.2,70.3 10,70.1 10,67.1 9.4,66.5
no net on Top Layer "Bottom Layer-No Net" (solid, pour order 42): -0.2,52.5 37.8,52.5 37.8,41 15.5,41 15.5,0 -0.2,0 -0.2,52.5
3V3 on Top Layer "Bottom Layer-No Net" (solid, pour order 36): 37.504,60.4 38.204,61.1 41.4,61.1 41.6,61.3 41.6,62.7 42.722,63.822 44.278,63.822 44.4,63.7 44.4,62.1 42.4,60.1 41.7,60.1 41.1,59.5 41.1,55.9 40.45,55.25 39.4,56.133 39.4,58.3 35.6,58.3 35.6,60.4
3V3 on Top Layer "Bottom Layer-No Net" (solid, pour order 34): 50.7,69.7 44.2,69.7 44.2,63.3 50.7,63.3
5Vin on Top Layer "Bottom Layer-No Net" (solid, pour order 10): 4.9,73.1 8,73.1 8,75.2 11,75.2 11,74.5 14.1,74.5 14.9,73.7 14.9,69.4 14.7,69.2 13.7,69.2 13.7,70.4 13.4,70.7 10.3,70.7 9.8,70.2 9.8,67.4 9.7,67.3 9.2,66.8 4.9,66.8
GND on Bottom Layer "Bottom Layer-No Net" (solid, pour order 68): 32,54.5 32,82.4 73.8,82.4 73.8,41 39.8,41 39.8,54.5
"GND LCD" on Bottom Layer "Bottom Layer-No Net" (solid, pour order 64): 17.5,39 17.5,0 73.8,0 73.8,39
no net on Bottom Layer "Bottom Layer-No Net" (solid, pour order 58): 31.5,54.5 31.5,82.4 0,82.4 0,54.5
GND on Bottom Layer "Bottom Layer-No Net" (solid, pour order 48): 22,78.5 30.7,78.5 30.7,60.8 25.5,60.8 22,64.3
no net on Bottom Layer "Bottom Layer-No Net" (solid, pour order 44): -0.2,52.5 37.8,52.5 37.8,41 15.5,41 15.5,0 -0.2,0
GND on Bottom Layer "Bottom Layer-No Net" (solid, pour order 40): 30.2,63.4 30.6,63.4 30.8,63.2 32.8,63.2 32.8,60.8 30.2,60.8

## Keep-outs
Keep-Out Layer:
  lines w0.1: 37.8,54.5 39.8,54.5 39.8,52 cw(c38.8,52) 37.8,52 37.8,52.5 34.4,52.5 cw(c34.4,53.5) 34.4,54.5 37.9,54.5 ; 39.8,41 39.8,42.5 ccw(c38.8,42.5) 37.8,42.5 37.8,41 34.3,41 ccw(c34.3,40) 34.3,39 37.8,39 41.3,39 44.8,39 ccw(c44.8,40) 44.8,41 41.3,41 39.8,41 ; 39.8,41 39.8,41 ; 0,0 0,52.5 ccw(c0,53.5) 0,54.5 0,79.4 ccw(c0,82.4) 3,82.4 45,82.4 70.8,82.4 ccw(c73.8,82.4) 73.8,79.4 73.8,41 ccw(c73.8,40) 73.8,39 73.8,0 17.5,0 ccw(c16.5,0) 15.5,0 0,0 ; 3,52.5 cw(c3,53.5) 3,54.5 6.5,54.5 cw(c6.5,53.5) 6.5,52.5 3,52.5 ; 9.5,52.5 cw(c9.5,53.5) 9.5,54.5 13,54.5 cw(c13,53.5) 13,52.5 9.5,52.5 ; 15.5,3 ccw(c16.5,3) 17.5,3 17.5,6.5 ccw(c16.5,6.5) 15.5,6.5 15.5,3 ; 15.5,9.5 ccw(c16.5,9.5) 17.5,9.5 17.5,13 ccw(c16.5,13) 15.5,13 15.5,9.5 ; 15.5,16 ccw(c16.5,16) 17.5,16 17.5,19.5 ccw(c16.5,19.5) 15.5,19.5 15.5,16 ; 15.5,22.5 ccw(c16.5,22.5) 17.5,22.5 17.5,26 ccw(c16.5,26) 15.5,26 15.5,22.5 ; 15.5,29 ccw(c16.5,29) 17.5,29 17.5,32.5 ccw(c16.5,32.5) 15.5,32.5 15.5,29 ; 15.5,35.5 ccw(c16.5,35.5) 17.5,35.5 17.5,39 18.3,39 ccw(c18.3,40) 18.3,41 15.5,41 15.5,39 15.5,35.5 ; 16,52.5 cw(c16,53.5) 16,54.5 18.4,54.5 cw(c18.4,53.5) 18.4,52.5 16,52.5 ; 21.3,39 cw(c21.3,40) 21.3,41 24.8,41 cw(c24.8,40) 24.8,39 21.3,39 ; 21.4,52.5 cw(c21.4,53.5) 21.4,54.5 24.9,54.5 cw(c24.9,53.5) 24.9,52.5 21.4,52.5 ; 27.8,39 cw(c27.8,40) 27.8,41 31.3,41 cw(c31.3,40) 31.3,39 27.8,39 ; 27.9,52.5 cw(c27.9,53.5) 27.9,54.5 31.4,54.5 cw(c31.4,53.5) 31.4,52.5 27.9,52.5 ; 37.8,45.5 ccw(c38.8,45.5) 39.8,45.5 39.8,49 ccw(c38.8,49) 37.8,49 37.8,45.5 ; 47.8,39 cw(c47.8,40) 47.8,41 51.3,41 cw(c51.3,40) 51.3,39 47.8,39 ; 54.3,39 cw(c54.3,40) 54.3,41 57.8,41 cw(c57.8,40) 57.8,39 54.3,39 ; 60.8,39 cw(c60.8,40) 60.8,41 64.3,41 cw(c64.3,40) 64.3,39 60.8,39 ; 67.3,39 cw(c67.3,40) 67.3,41 70.8,41 cw(c70.8,40) 70.8,39 67.3,39

## Other copper
Top Layer:
  pour cut-out: 72.3,16.8 73,16.1 73,14.8 72.4,14.2 71.1,14.2 70.5,14.8 70.5,16 70.4,16.1 71.1,16.8
  pour cut-out: 33.4,58.3 33.4,58.1 31.5,58.1 31.5,58.3
  pour cut-out: 32,58.1 39.327,58.1 39.4,58.173 39.4,59.4 39,59.8 38.3,59.8 37.9,59.4 37.9,58.3 32,58.3
  pour cut-out: 24,73.4 23.8,73.4 24,73.2
  pour cut-out: 7.877,64.077 8.377,64.577 9.177,64.577 9.677,64.077
  pour cut-out: 33.4,64.27 35.638,64.27 36.714,65.347 36.943,65.347 36.943,64.38 37.023,64.3 38.1,64.3 38.1,63 35.9,63 35.684,63.216 33.4,63.216
  pour cut-out: 33.4,64.27 35.638,64.27 36.714,65.347 36.943,65.347 36.943,64.38 37.023,64.3 38.1,64.3 38.1,63 35.9,63 35.684,63.216 33.4,63.216
  pour cut-out: 33.1,60.8 37.9,60.8 37.9,60.796 37.643,60.539 33.2,60.539
  pour cut-out: 37.9,59.4 38.3,59.8 39.4,59.8 39.4,58.3 37.9,58.3
  pour cut-out: 41.4,59.5 41.4,55.9 44,53.3 47.6,53.3 47.6,59.5
  pour cut-out: 37.9,63 37.9,62.6 39.7,62.6 39.7,63
  region net GND: 22.9,72.75 23.7,72.75 23.7,71 22.9,71
  region net GND: 38.8,62.55 41.3,62.55 41.3,61.4 38.8,61.4
Bottom Layer:
  pour cut-out: 32.018,68.072 32.047,68.1 33.7,68.1 33.7,62.5 33.1,62.5 32.4,63.2 32,63.2
  pour cut-out: 32,60.8 33.5,60.8 33.5,60.4 33.3,60.2 32,60.2
  pour cut-out: 33.2,67.044 33.256,67.1 33.7,67.1 36.6,64.2 36.6,60.4 33.1,60.4 33.1,60.7 33,60.8 33.1,60.9 33.1,63.2
  pour cut-out: 42.7,59.3 42.7,57.5 45.3,54.9 47.4,54.9 47.4,59.3
  region net GND: 22.9,72.75 23.7,72.75 23.7,70.8 22.9,70.8
  region net GND: 41.3,62.55 41.3,61.4 38.8,61.4 38.8,62.55

## Silkscreen, mask and mechanical layers (free items; w line width, h text height)
Top Overlay:
  text "fontes35@mail.ru / 15.11.21" at 55.6,78.5 h2
  text "BAT+" at 17.4,76.4 h2 r90
  text "-" at 5,75.1 h2 r90
  text "LED" at 4.6,72.8 h2 r90
  text "+" at 4.9,71.9 h2 r90
  text "BAT-" at 17.5,67.5 h2 r90
  text "3V3" at 48.86,46.9 h2 r90
  text "SWDIO" at 51.4,46.9 h2 r90
  text "SWCLK" at 53.94,46.9 h2 r90
  text "GND" at 56.48,46.9 h2 r90
Size:
  lines w0.1: 45.65,19.25 45.65,20.25 ; 69.4,52.65 69.4,55.6

## Dimensions
0,79.4 to 73.8,79.4 on Size
70.8,82.4 to 73.8,0 on Size
69.9,45 to 73.8,41 on Size
3.9,58.5 to 0,54.5 on Size
3.9,78.5 to 0,79.4 on Size
3.9,78.5 to 3,82.4 on Size
69.9,78.5 to 70.8,82.4 on Size
69.9,78.5 to 73.8,79.4 on Size
69.4,75 to 69.4,52.65 on Size
71.5,36.7 to 71.5,2.3 on Size
17.5,0 to 73.8,0 on Size
19.8,2.3 to 71.5,2.3 on Size